# Altium PCB PCB1_ZONES_1.PcbDoc (part 1 of 2)
Units mil, origin at the board's own origin, x right, y up, seen from the top; angles counter-clockwise.
Board outline 1968.5 x 1968.5 mil, 2 copper layers (Top Layer, Bottom Layer); 97 components, 59 nets, 306 pads, 369 vias.
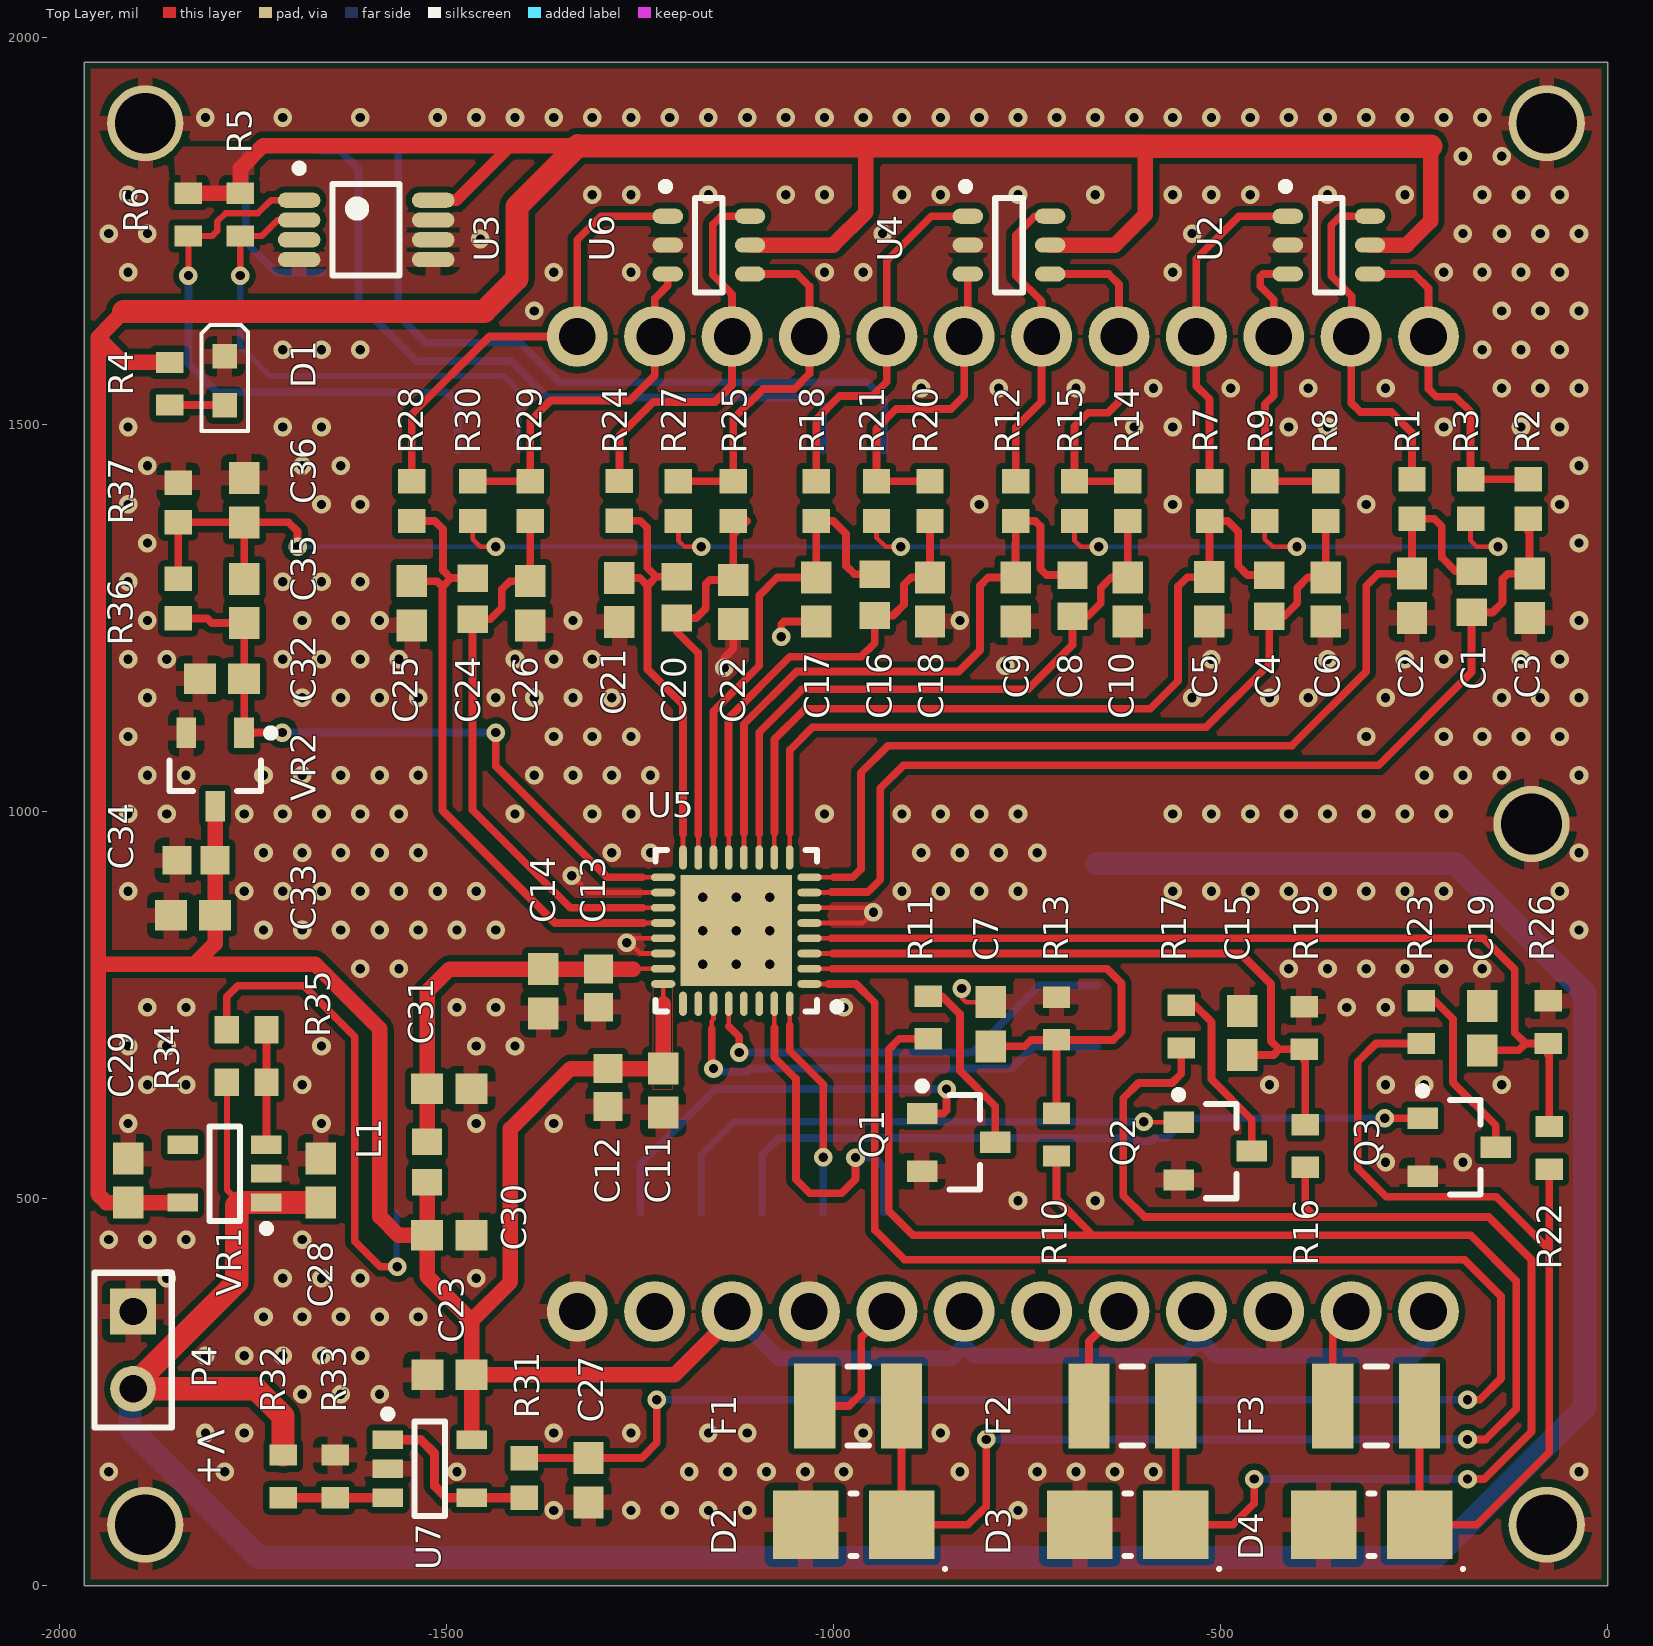
[diagram p0: Top Layer view]
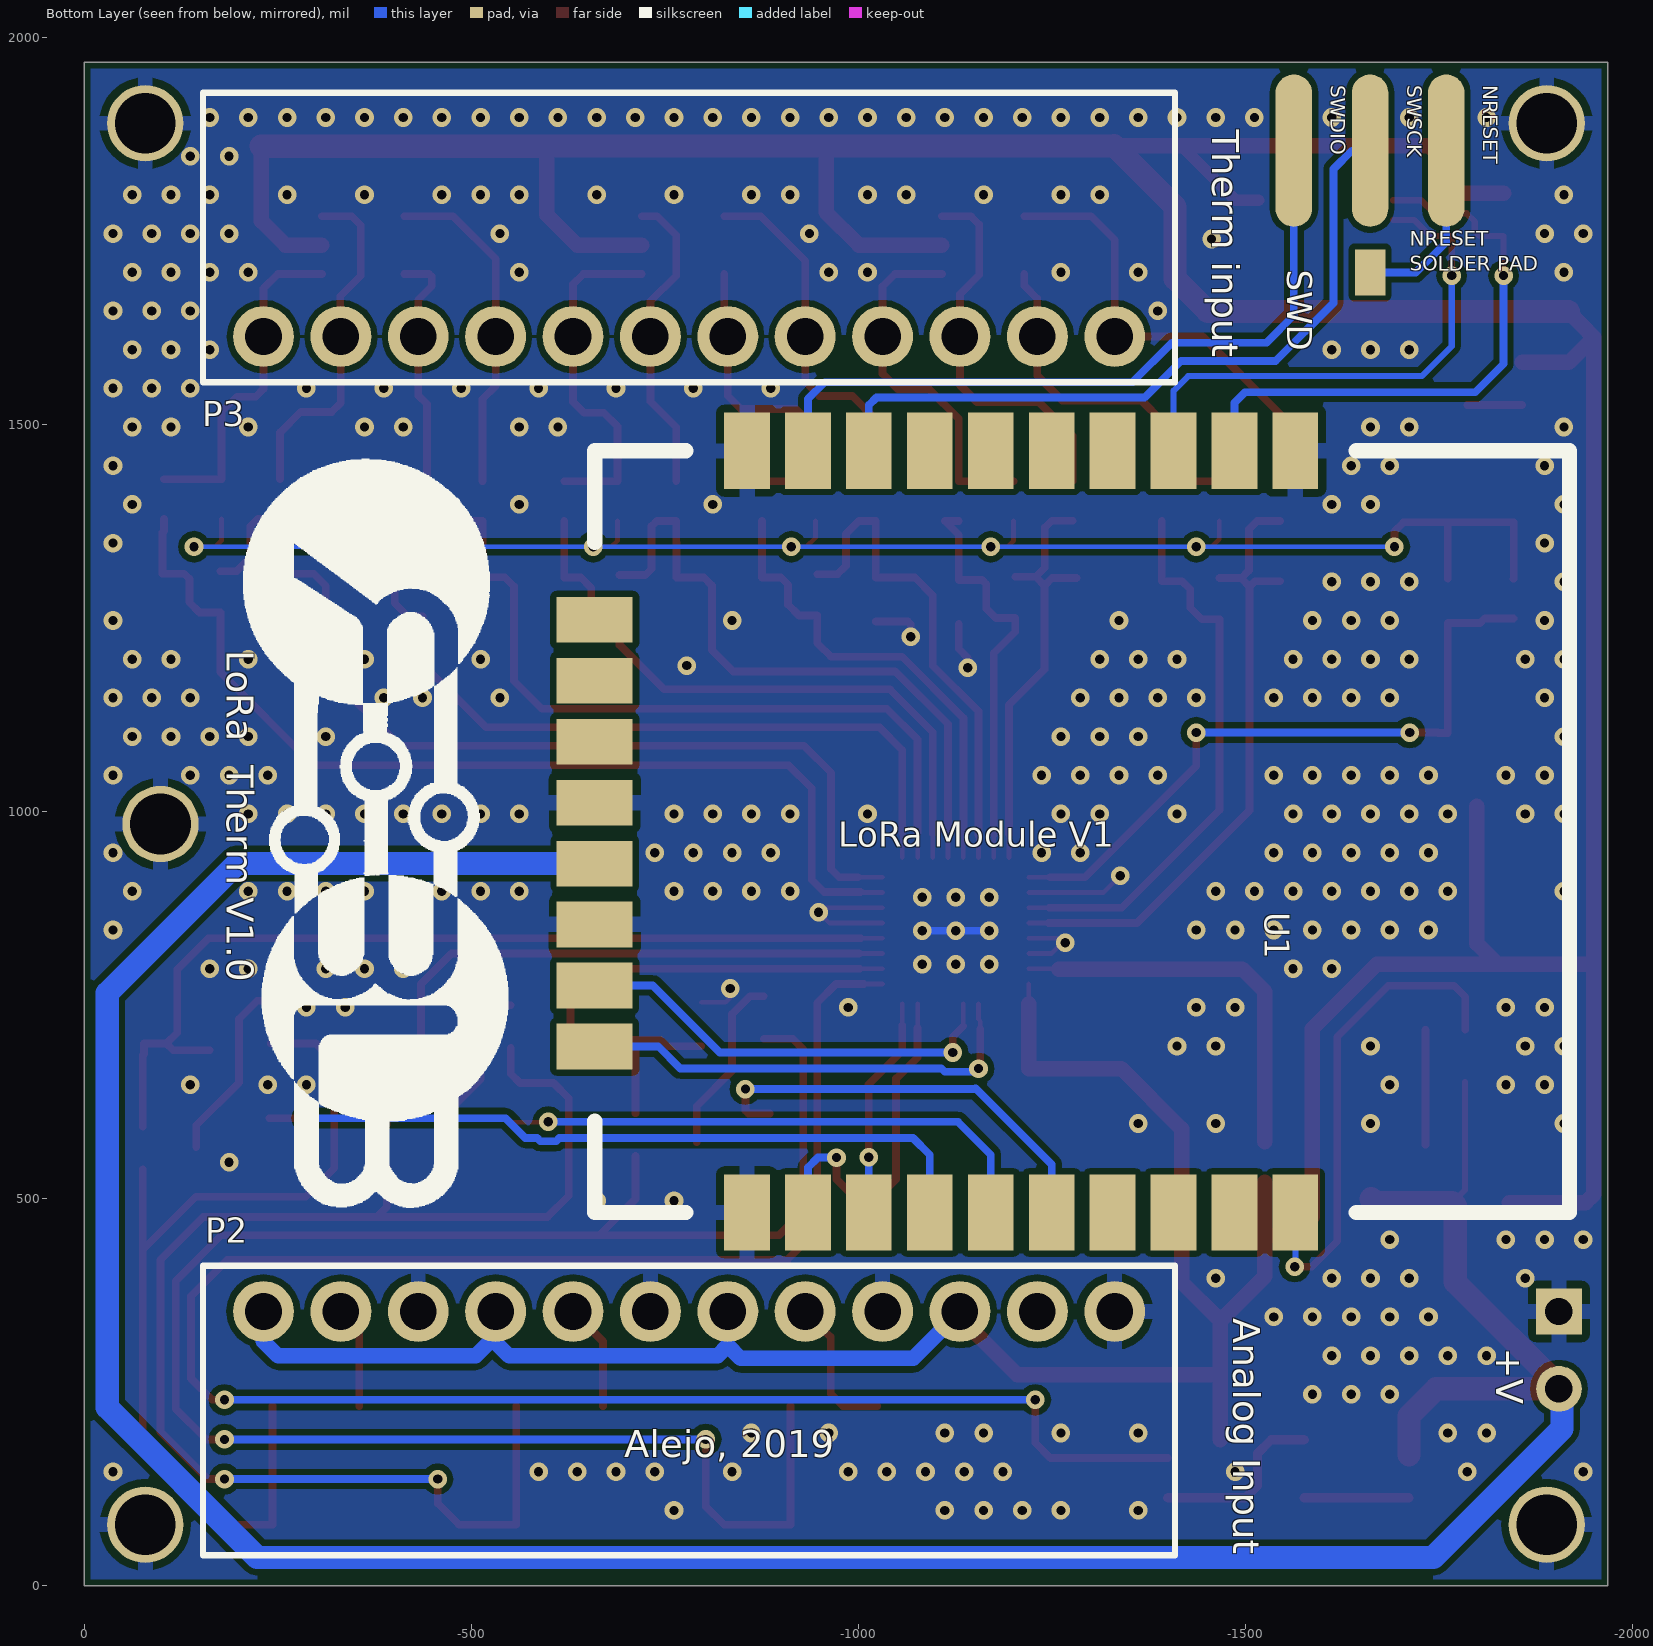
[diagram p1: Bottom Layer view, seen from below]
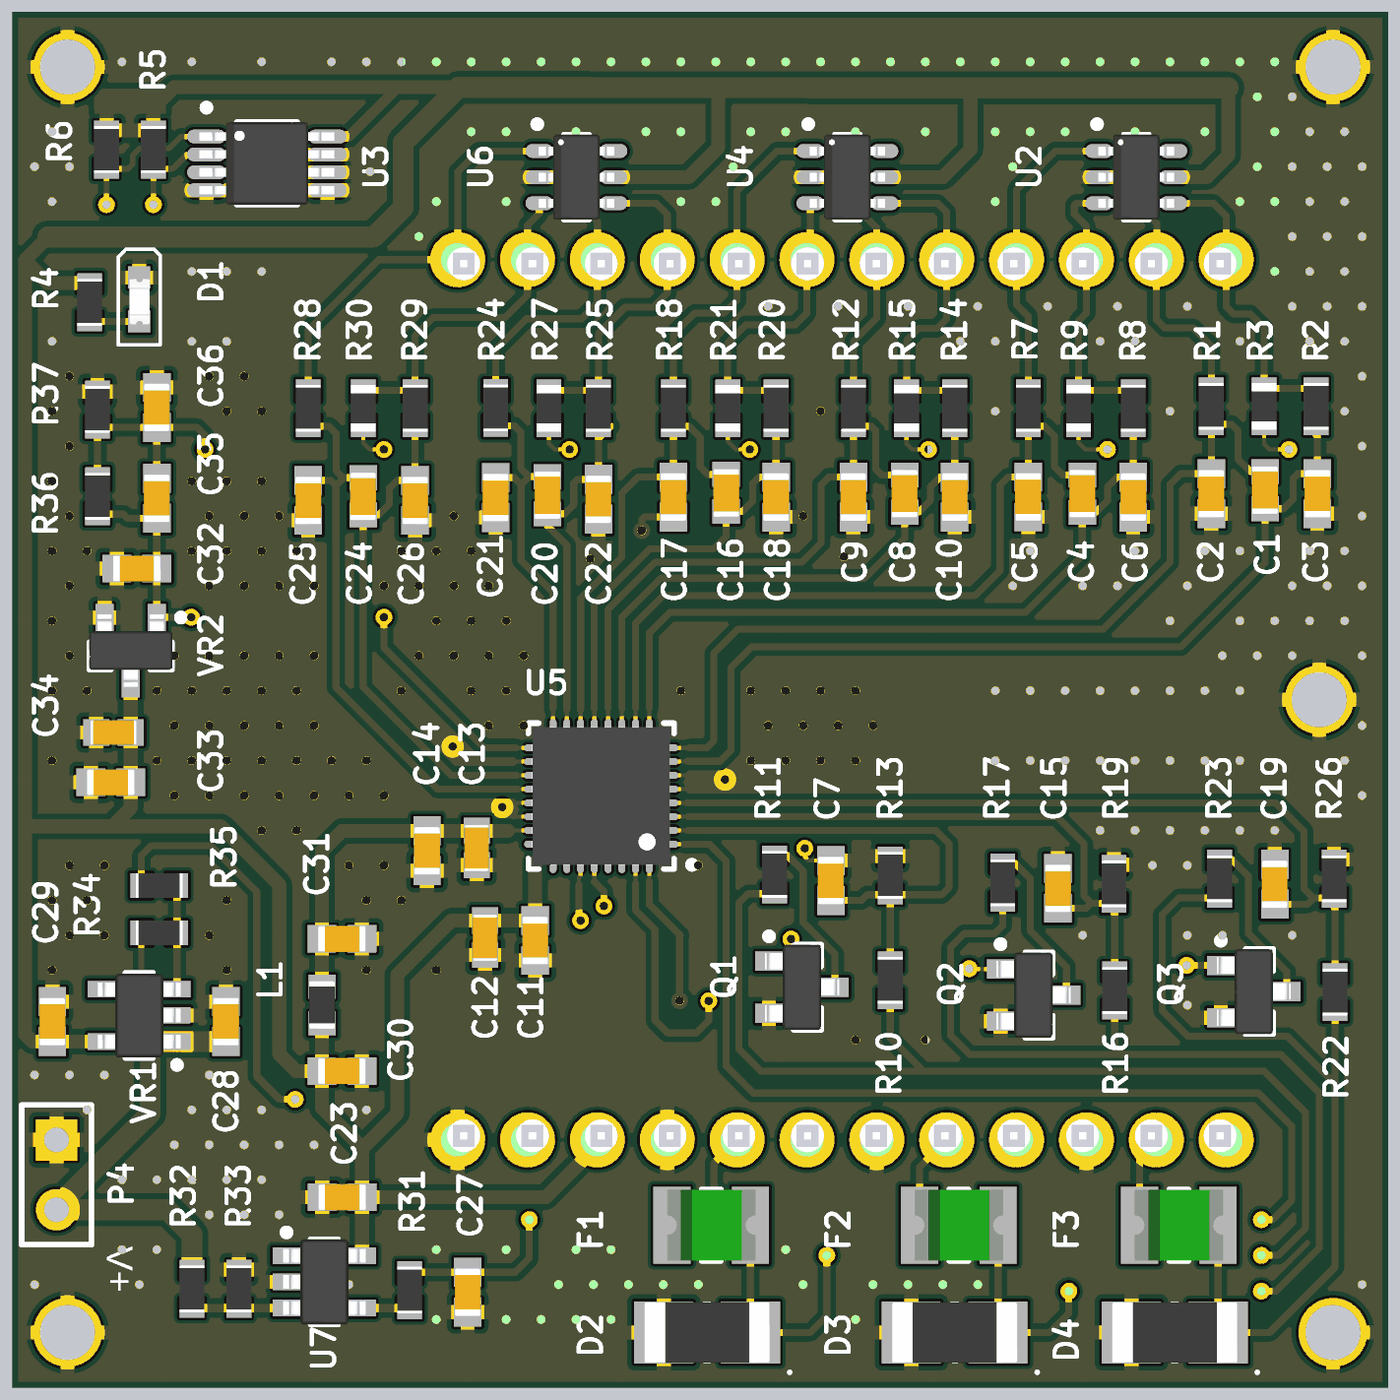
[diagram p2: 3D render of the assembled board from above, using the file's embedded part models]
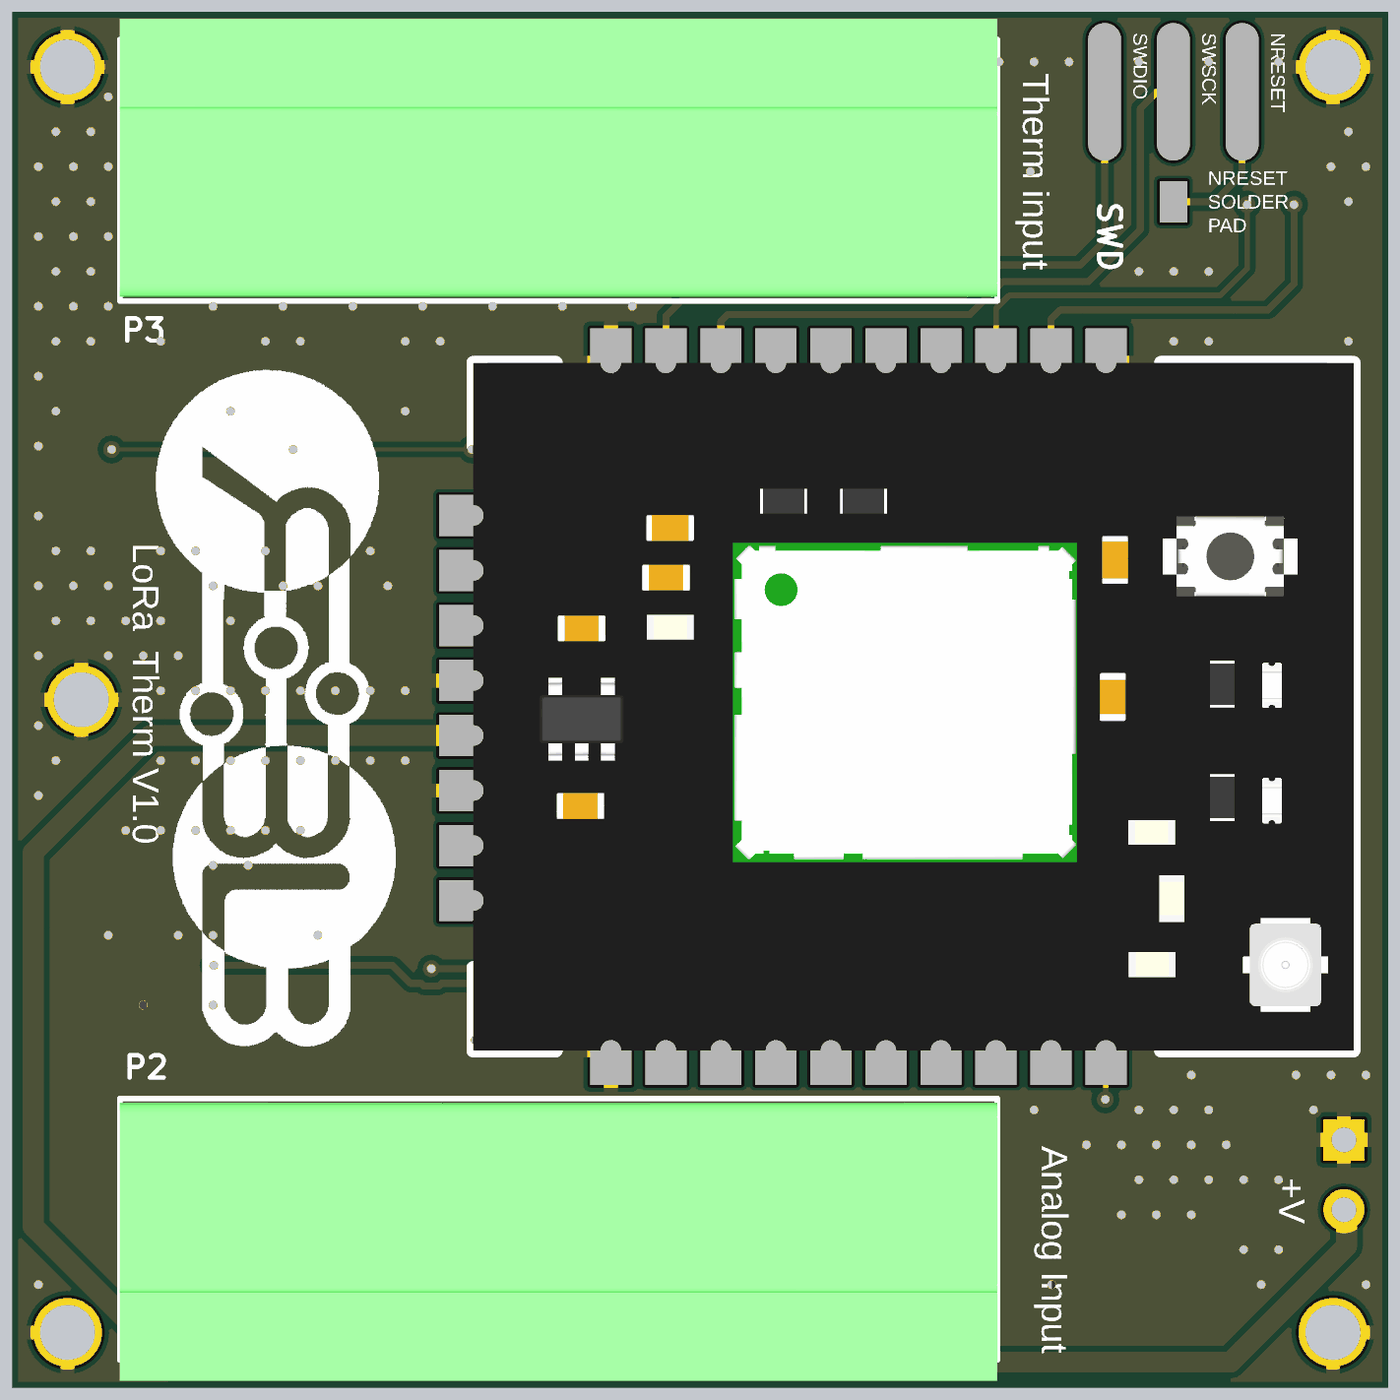
[diagram p3: 3D render of the assembled board from below, using the file's embedded part models]

## Layer stack, top to bottom
Top Solder: solder mask 0.4, Solder Resist, Dk 3.5
Top Layer: signal copper 1.4
Dielectric 1: dielectric 12.6, FR-4, Dk 4.8
Bottom Layer: signal copper 1.4
Bottom Solder: solder mask 0.4, Solder Resist, Dk 3.5

## Board outline
-1968.5,0 0,0 0,1968.5 -1968.5,1968.5

## Design rules (kind name [scope] priority, off if disabled: settings)
BoardOutlineClearance [All] p1: gap=7.87 ignorepadtopadclearanceinfootprint=FALSE except(15.75: Arc-SplitBarrior Arc-SplitContinuation Track-SplitBarrior Track-SplitContinuation SMDPad-SplitBarrior SMDPad-SplitContinuation THPad-SplitBarrior THPad-SplitContinuation Via-SplitBarrior Via-SplitContinuation Fill-SplitBarrior Fill-SplitContinuation Poly-SplitBarrior Poly-SplitContinuation Region-SplitBarrior Region-SplitContinuation Text-SplitBarrior Text-SplitContinuation)
Clearance "Clearance Bottom Layer" [OnLayer('Bottom Layer')] p1: gap=8 ignorepadtopadclearanceinfootprint=TRUE except(10: Arc-Text Track-Text SMDPad-Text THPad-Text Via-Text Fill-Text Poly-Text Region-Text Text-Text)
Clearance "Clearance Top Layer" [OnLayer('Top Layer')] p2: gap=8 ignorepadtopadclearanceinfootprint=TRUE except(10: Arc-Text Track-Text SMDPad-Text THPad-Text Via-Text Fill-Text Poly-Text Region-Text Text-Text)
Clearance [All] p3: gap=7.87 ignorepadtopadclearanceinfootprint=FALSE except(3.5: Arc-Arc Arc-Track Arc-SMDPad Track-Track Track-SMDPad SMDPad-SMDPad; 5: Arc-Via Track-Via SMDPad-Via THPad-Via Via-Via; 10: Arc-Text Track-Text SMDPad-Text THPad-Text Via-Text Fill-Text Poly-Text Region-Text Text-Text)
HoleSize [All] p1: absolutevalues=TRUE maxlimit=248.03 minlimit=7.87 maxpercent=80.000 minpercent=20.000
MinimumAnnularRing [All] p1: minimumring=3
MinimumSolderMaskSliver [All] p1: minsoldermaskwidth=3.94
PolygonConnect PolygonConnect_1 [All] p1: thpad.connectstyle=Relief thpad.reliefconductorwidth=20 thpad.reliefentries=4 thpad.polygonreliefangle="90 Angle" thpad.airgapwidth=10 smdpad.connectstyle=Relief smdpad.reliefconductorwidth=20 smdpad.reliefentries=4 smdpad.polygonreliefangle="90 Angle" smdpad.airgapwidth=10 via.connectstyle=Direct via.reliefconductorwidth=20 via.reliefentries=4 via.polygonreliefangle="90 Angle" via.airgapwidth=10
RoutingCorners [All] p1: cornerstyle=Round minsetback=100 maxsetback=100
RoutingVias [All] p1: holewidth=19.68 width=39.37 viastyle="Through Hole" minholewidth=7.87 minwidth=17.72 maxholewidth=39.37 maxwidth=78.74
SMDEntry [All] p1: side=TRUE corner=FALSE anyangle=FALSE
SilkToSilkClearance [All] p1: silktosilkclearance=3.94
SilkToSolderMaskClearance [IsPad] p1: minsilkscreentomaskgap=3.94 clearancetoexposedcopper=TRUE
SolderMaskExpansion [All] p1: expansion=4
Width [All] p1: maxlimit=100 minlimit=3.5 preferedwidth=15
25 further rules are at their usual default settings.

## Classes and differential pairs
component class Sheet1: C1 C2 C3 C4 C5 C6 C7 C8 C9 C10 C11 C12 C13 C14 C15 C16 C17 C18 C19 C20 C21 C22 C23 C24 C25 C26 C27 D1 D2 D3 D4 F1 F2 F3 P2 P3 Q1 Q2 Q3 R1 R2 R3 R4 R5 R6 R7 R8 R9 R10 R11 R12 R13 R14 R15 R16 R17 R18 R19 R20 R21 R22 R23 R24 R25 R26 R27 R28 R29 R30 R31 R32 R33 SWD U1 U2 U3 U4 U5 U6 U7
component class supply: C28 C29 C30 C31 C32 C33 C34 C35 C36 L1 P4 R34 R35 R36 R37 VR1 VR2

## Components (designator, comment, footprint, x,y, rotation, side; value= is the part's Value field where it differs from the comment)
C1 "0.1uF" Chip2PinKEMETcap -175.9,1284.2 r270 top
C2 "0.01 uF" Chip2PinWURTcap -252.86,1279.2 r270 top
C3 "0.01 uF" Chip2PinWURTcap -100.9,1279.2 r90 top
C4 "0.1uF" Chip2PinKEMETcap -437.47,1279.36 r270 top
C5 "0.01 uF" Chip2PinWURTcap -514.76,1274.61 r270 top
C6 "0.01 uF" Chip2PinWURTcap -364.44,1274.36 r90 top
C7 "0.01uF 0603" Chip2PinWURTcap -797.27,725.56 r90 top
C8 "0.1uF" Chip2PinKEMETcap -691.58,1279.36 r270 top
C9 "0.01 uF" Chip2PinWURTcap -765.07,1274.36 r270 top
C10 "0.01 uF" Chip2PinWURTcap -620.07,1274.36 r90 top
C11 "4.7uF" CHIP2TAIYOCAP -1292.04,643.64 r90 top
C12 "0.01 uF" Chip2PinWURTcap -1220.47,639.7 r270 top
C13 "4.7uF" CHIP2TAIYOCAP -1304.24,772.06 r90 top
C14 "0.01 uF" Chip2PinWURTcap -1375.28,768.12 r270 top
C15 "0.01uF 0603" Chip2PinWURTcap -472.27,714.36 r90 top
C16 "0.1uF" Chip2PinKEMETcap -947.21,1280.27 r270 top
C17 "0.01 uF" Chip2PinWURTcap -1022.67,1274.36 r270 top
C18 "0.01 uF" Chip2PinWURTcap -875.7,1274.36 r90 top
C19 "0.01uF 0603" Chip2PinWURTcap -161.96,720.28 r90 top
C20 "0.1uF" Chip2PinKEMETcap -1202.82,1277.04 r270 top
C21 "0.01 uF" Chip2PinWURTcap -1277.01,1273.7 r270 top
C22 "0.01 uF" Chip2PinWURTcap -1129.99,1271.13 r90 top
C23 "1uF" Chip2PinWURTcap -1496.69,272.29 r0 top
C24 "0.1uF" Chip2PinKEMETcap -1466.81,1275.42 r270 top
C25 "0.01 uF" Chip2PinWURTcap -1545.28,1269.52 r270 top
C26 "0.01 uF" Chip2PinWURTcap -1392.27,1269.52 r90 top
C27 "NM" Chip2PinWURTcap -1317.01,136.3 r270 top
C28 "1uF" Chip2PinWURTcap -1663.1,523.62 r90 top
C29 "1uF" Chip2PinWURTcap -1911.47,523.62 r90 top
C30 "0.01 uF" Chip2PinWURTcap -1497.05,452.76 r0 top
C31 "0.01 uF" Chip2PinWURTcap -1497.05,642.07 r0 top
C32 "1uF" Chip2PinWURTcap -1790.55,1171.98 r0 top
C33 "0.01 uF" Chip2PinWURTcap -1827.95,866.14 r0 top
C34 "4.7uF" CHIP2TAIYOCAP -1824.02,937.39 r0 top
C35 "1uF" Chip2PinWURTcap -1762.01,1272.54 r270 top
C36 "1uF" Chip2PinWURTcap -1762.01,1402.63 r270 top
D1 "Red LEDs" Wurth_LED_0603 -1787.21,1557.09 r90 top
D2 "10v" CHIP2PIN-SMB10JA -974.41,78.74 r0 top
D3 "10v" CHIP2PIN-SMB10JA -620.08,78.74 r0 top
D4 "10v" CHIP2PIN-SMB10JA -305.12,78.74 r0 top
F1 "MICROSMD005F" CHIP2PINMICROSMD005F -968.5,232.28 r0 top
F2 "MICROSMD005F" CHIP2PINMICROSMD005F -614.17,232.28 r0 top
F3 "MICROSMD005F" CHIP2PINMICROSMD005F -299.21,232.28 r0 top
L1 "120 ohm, 100MHz" CHIP22506031217Z0-FEBREAD -1525.59,547.41 r90 top
P2 "HEADER" 1881545 -781.5,354.33 r0 bottom locked
P3 "HEADER" 1881545 -781.5,1614.17 r180 bottom locked
P4 "" HDR1X2 -1905.51,354.33 r270 top
Q1 "FDV305N" SOT23-3PIN-ON-STANT -838.58,572.83 r0 top
Q2 "FDV305N" SOT23-3PIN-ON-STANT -507.27,561.63 r0 top
Q3 "FDV305N" SOT23-3PIN-ON-STANT -191.96,566.63 r0 top
R1 "1K" CHIP2VISHAYRES_0603 -252.86,1404.2 r90 top
R2 "1K" CHIP2VISHAYRES_0603 -102.86,1404.2 r90 top
R3 "10K" CHIP2PIN-ROHM-RES -177.17,1404.2 r270 top
R4 "470 Ohms" ChipYAGEO_0603 -1858.27,1553.15 r270 top
R5 "10K 0603 1%" ChipYAGEO_0603 -1766.9,1771.65 r90 top
R6 "10K 0603 1%" ChipYAGEO_0603 -1834,1771.65 r90 top
R7 "1K" CHIP2VISHAYRES_0603 -514.44,1401.42 r90 top
R8 "1K" CHIP2VISHAYRES_0603 -364.44,1401.42 r90 top
R9 "10K" CHIP2PIN-ROHM-RES -442.91,1401.42 r270 top
R10 "7.5K" ChipYAGEO_0603 -712.27,582.83 r270 top
R11 "523ohm 0603 1%" ChipYAGEO_0603 -877.95,734.25 r270 top
R12 "1K" CHIP2VISHAYRES_0603 -765.01,1401.42 r90 top
R13 "2.49K" ChipYAGEO_0603 -712.27,732.83 r270 top
R14 "1K" CHIP2VISHAYRES_0603 -620.07,1401.42 r90 top
R15 "10K" CHIP2PIN-ROHM-RES -688.98,1401.42 r270 top
R16 "7.5K" ChipYAGEO_0603 -390.96,568.15 r270 top
R17 "523ohm 0603 1%" ChipYAGEO_0603 -551.18,722.44 r270 top
R18 "1K" CHIP2VISHAYRES_0603 -1022.67,1401.42 r90 top
R19 "2.49K" ChipYAGEO_0603 -392.27,720.71 r270 top
R20 "1K" CHIP2VISHAYRES_0603 -875.7,1401.42 r90 top
R21 "10K" CHIP2PIN-ROHM-RES -944.88,1401.42 r270 top
R22 "7.5K" ChipYAGEO_0603 -75.65,565.71 r270 top
R23 "523ohm 0603 1%" ChipYAGEO_0603 -241.02,728.15 r270 top
R24 "1K" CHIP2VISHAYRES_0603 -1277.01,1401.83 r90 top
R25 "1K" CHIP2VISHAYRES_0603 -1129.99,1401.42 r90 top
R26 "2.49K" ChipYAGEO_0603 -76.96,728.15 r270 top
R27 "10K" CHIP2PIN-ROHM-RES -1200.79,1401.42 r270 top
R28 "1K" CHIP2VISHAYRES_0603 -1545.28,1401.42 r90 top
R29 "1K" CHIP2VISHAYRES_0603 -1392.27,1401.42 r90 top
R30 "10K" CHIP2PIN-ROHM-RES -1466.54,1401.42 r270 top
R31 "0 ohm" CHIP2VISHAYRES_0603 -1400.07,139.25 r90 top
R32 "1M" ChipYAGEO_0603 -1711.59,141.22 r270 top
R33 "1M" ChipYAGEO_0603 -1644.5,141.22 r270 top
R34 "0 ohm" CHIP2VISHAYRES_0603 -1758.74,650.48 r180 top
R35 "0 ohm" CHIP2VISHAYRES_0603 -1758.74,718.5 r0 top
R36 "1K" CHIP2VISHAYRES_0603 -1847.01,1275.49 r90 top
R37 "1K" CHIP2VISHAYRES_0603 -1847.01,1399.68 r90 top
SWD "SWD" EDGECONN-5P -1562.99,1854.33 r180 bottom (schematic designator P?)
U1 "loRa node v1" LORA_NODE -659.45,482.28 r270 bottom locked
U2 "IP4220CZ6F" TSOP6-IP4220CZ6F -360.24,1732.28 r0 top
U3 "MCP9808T" SOP127P600-8N-MCP9808T -1604.33,1751.97 r0 top
U4 "IP4220CZ6F" TSOP6-IP4220CZ6F -773.62,1732.28 r0 top
U5 "AD71994" QFN127P600-AD7194BCPZ -1125.98,846.46 r180 top
U6 "IP4220CZ6F" TSOP6-IP4220CZ6F -1161.42,1732.28 r0 top
U7 "MCP6001T-I/OT" SOT23-MCP600 -1522.28,151.06 r0 top
VR1 "TLV755P" SOT23-TLV755P -1787.28,532.48 r180 top
VR2 "AD1582BRTZ" SOT23-AD1582BRTZ -1799.41,1054.69 r270 top

## Footprints (in the part's own frame and the unit in brackets; to place one, negate y for a bottom-side part, rotate by r counter-clockwise, add the part's x,y. Pads: shape width x height; smd on the part's side, far side on the other; paste and mask are expansions set on the pad)
1881545 [mm]
  round 2 hole 1.2: 1(-13.97,0) 2(-11.43,0) 3(-8.89,0) 4(-6.35,0) 5(-3.81,0) 6(-1.27,0) 7(1.27,0) 8(3.81,0) 9(6.35,0) 10(8.89,0) 11(11.43,0) 12(13.97,0)
  silkscreen extent -15.95,-1.5 15.95,8, body extent -15.95,-1.35 15.95,8.75, height 8.1
CHIP2PIN-ROHM-RES [mm]
  rect 0.8x0.9 smd: 1(-0.65,0) 2(0.65,0)
  body extent -0.85,-0.45 0.85,0.45, height 0.55
CHIP2PIN-SMB10JA [mm]
  rect 2.15x2.25 smd: 1(-1.575,0) 2(1.575,0)
  silkscreen extent -0.1,-1.5 3.05,1.02, body extent -2.28,-1.1 2.28,1.1, height 2.5
Chip2PinKEMETcap [mm]
  rect 0.9x1 smd: 1(-0.675,0) 2(0.675,0)
  body extent -0.87,-0.48 0.87,0.48, height 0.55
CHIP2PINMICROSMD005F [mm]
  rect 1.35x2.8 smd: 1(-1.425,0) 2(1.425,0)
  silkscreen extent -0.35,-1.3 0.35,1.3, body extent -1.61,-1.29 1.61,1.29, height 0.67
Chip2PinWURTcap [mm]
  rect 1.05x1 smd: 1(-0.725,0) 2(0.725,0)
  body extent -0.87,-0.48 0.87,0.48, height 0.55
CHIP2TAIYOCAP [mm]
  rect 0.95x0.95 smd: 1(-0.625,0) 2(0.625,0)
  body extent -0.85,-0.45 0.85,0.45, height 0.55
CHIP2VISHAYRES_0603 [mm]
  rect 0.8x0.9 smd: 1(-0.65,0) 2(0.65,0)
  body extent -0.85,-0.45 0.85,0.45, height 0.6
CHIP22506031217Z0-FEBREAD [mm]
  rect 0.87x0.98 smd: 1(-0.665,0) 2(0.665,0)
  body extent -0.87,-0.48 0.87,0.48, height 0.95
ChipYAGEO_0603 [mm]
  rect 0.7x0.9 smd: 1(-0.7,0) 2(0.7,0)
  body extent -0.85,-0.45 0.85,0.45, height 0.55
EDGECONN-5P [mm]
  oval 1.2x5 smd: 1(2.5,0) 2(0,0) ""(5,0)
  rect 1x1.5 smd: ""(2.5,-4)
  Top Layer lines w0.254: 5,0 5,-3 4,-4 2.5,-4
HDR1X2 [mm] "Connector; Header; 2 Position"
  rect 1.5x1.5 hole 0.9: 1(0,0)
  round 1.5 hole 0.9: 2(2.54,0)
  silkscreen extent -1.27,-1.27 3.81,1.27
LORA_NODE [mm]
  rect 2.5x1.5 smd: 1(-25,23) 2(-25,21) 3(-25,19) 4(-25,17) 5(-25,15) 6(-25,13) 7(-25,11) 8(-25,9) 9(-25,7) 10(-25,5) 19(0,5) 20(0,7) 21(0,9) 22(0,11) 23(0,13) 24(0,15) 25(0,17) 26(0,19) 27(0,21) 28(0,23)
  rect 1.5x2.5 smd: 11(-19.45,0) 12(-17.45,0) 13(-15.45,0) 14(-13.45,0) 15(-11.45,0) 16(-9.45,0) 17(-7.45,0) 18(-5.45,0)
  silkscreen extent -25,0 0,32, body extent -25,0 0,32, height 2.45
QFN127P600-AD7194BCPZ [mm]
  oval 0.8x0.25 smd: 1(-2.4,1.75) 2(-2.4,1.25) 3(-2.4,0.75) 4(-2.4,0.25) 5(-2.4,-0.25) 6(-2.4,-0.75) 7(-2.4,-1.25) 8(-2.4,-1.75) 17(2.4,-1.75) 18(2.4,-1.25) 19(2.4,-0.75) 20(2.4,-0.25) 21(2.4,0.25) 22(2.4,0.75) 23(2.4,1.25) 24(2.4,1.75)
  oval 0.25x0.8 smd: 9(-1.75,-2.4) 10(-1.25,-2.4) 11(-0.75,-2.4) 12(-0.25,-2.4) 13(0.25,-2.4) 14(0.75,-2.4) 15(1.25,-2.4) 16(1.75,-2.4) 25(1.75,2.4) 26(1.25,2.4) 27(0.75,2.4) 28(0.25,2.4) 29(-0.25,2.4) 30(-0.75,2.4) 31(-1.25,2.4) 32(-1.75,2.4)
  rect 3.65x3.65 smd: 33(0,0)
  silkscreen extent -3.43,-2.65 2.65,2.65, body extent -2.52,-2.52 2.52,2.52, height 0.8
SOP127P600-8N-MCP9808T [mm]
  oval 1.4x0.5 smd: 1(-2.2,0.975) 2(-2.2,0.325) 3(-2.2,-0.325) 4(-2.2,-0.975) 5(2.2,-0.975) 6(2.2,-0.325) 7(2.2,0.325) 8(2.2,0.975)
  silkscreen extent -2.32,-1.5 1.1,2.15, body extent -2.45,-1.5 2.45,1.5, height 1.1
SOT23-3PIN-ON-STANT [mm]
  rect 1x0.7 smd: 1(-1.2,0.95) 2(-1.2,-0.95) 3(1.2,0)
  silkscreen extent -1.32,-1.55 0.7,1.97, body extent -1.35,-1.55 1.35,1.55, height 1.2
SOT23-AD1582BRTZ [mm]
  rect 1x0.65 smd: 1(-1.2,0.95) 2(-1.2,-0.95) 3(1.2,0)
  silkscreen extent -1.32,-1.5 0.7,1.95, body extent -1.32,-1.52 1.32,1.52, height 1.12
SOT23-MCP600 [mm]
  rect 1x0.6 smd: 1(-1.375,0.95) 2(-1.375,0) 3(-1.375,-0.95) 4(1.375,-0.95) 5(1.375,0.95)
  silkscreen extent -1.5,-1.55 0.5,1.92, body extent -1.5,-1.55 1.5,1.55, height 1.45
SOT23-TLV755P [mm]
  rect 1x0.6 smd: 1(-1.375,0.95) 2(-1.375,0) 3(-1.375,-0.95) 4(1.375,-0.95) 5(1.375,0.95)
  silkscreen extent -1.5,-1.55 0.5,1.92, body extent -1.5,-1.53 1.5,1.53, height 1.45
TSOP6-IP4220CZ6F [mm] "TSOP, 6-Leads, Body 2.90x1.50mm, Pitch 0.95mm, IPC Medium Density"
  oval 1x0.5 smd: 1(-1.35,0.95) 2(-1.35,0) 3(-1.35,-0.95) 4(1.35,-0.95) 5(1.35,0) 6(1.35,0.95)
  silkscreen extent -1.55,-1.55 0.45,2.05, body extent -1.38,-1.55 1.38,1.55, height 1.1
Wurth_LED_0603 [mm]
  rect 0.8x0.8 smd: 1(-0.8,0) 2(0.8,0)
  silkscreen extent -1.65,-0.76 1.83,0.76, body extent -0.9,-0.38 0.75,0.35, height 0.68

## Part data
C1 C4 C8 C16 C20 C24: library part C0603C104J3RAC, "Multilayer Ceramic Capacitors MLCC - SMD/SMT 25V 0.1uF 0603 X7R 0.05", Capacitance="0.1 uF", Capacitance - nF="100 nF", Capacitance - pF="100000 pF", Case Code - in=0603, Case Code - mm=1608, Dielectric=X7R, Manufacturer=KEMET, Maximum Operating Temperature="+ 125 C", Minimum Operating Temperature="- 55 C", Package / Case="0603 (1608 metric)", Supplier Part Number 1=80-C0603C104J3RAC, Tolerance="5 %", Voltage Rating AC=-, Voltage Rating DC="25 VDC", Brand=KEMET, Category="Multilayer Ceramic Capacitors MLCC - SMD/SMT", Class="Class 2", CNHTS=8532241000, ComponentLink1Description=http://www.mouser.com/datasheet/2/212/KEM_C1002_X7R_SMD-1102033.pdf, ComponentLink1URL=http://www.mouser.com/datasheet/2/212/KEM_C1002_X7R_SMD-1102033.pdf, Height="0.8 mm", HTS Code=8532240020, LatestRevisionDate=17-Jul-2002, LatestRevisionNote="Re-released for DXP Platform.", Length="1.6 mm", Manufacturer Part Number=C0603C104J3RAC, Minimum Order Quantity=1, PackageDescription="Radial Cap, Thru-Hole; 2 Leads; 0.3 in Pin Spacing", PackageReference=RAD-0.3, Packaging="Cut Tape", Pricing 1="1=0.367, 10=0.213, 100=0.129, 500=0.117, 1000=0.106, 4000=0.079, 8000=0.072, 24000=0.069, 48000=0.061 (EUR)", Product="General Type MLCCs", Product Type="Ceramic Capacitors", Published=8-Jun-2000, Publisher="Altium Limited", Reeling=True, RoHS="RoHS Compliant", RoHS - Mouser=Y, Series="SMD Comm X7R", Standard Pack Qty=4000, Stock 1=3422, Subcategory=Capacitors, Supplier 1=Mouser, TARIC=8532240000, Termination=Standard, Termination Style=SMD/SMT, Width="0.8 mm"
C2 C3 C5 C6 C9 C10 C12 C14 C17 C18 C21 C22 C25 C26 C30 C31 C33: library part 885012206089, "Multilayer Ceramic Capacitors MLCC - SMD/SMT WCAP-CSGP 0.01uF 0603 10% 50V MLCC", Capacitance - nF="10 nF", Capacitance - pF="10000 pF", Case Code - in=0603, Case Code - mm=1608, Dielectric=X7R, Manufacturer="Wurth Electronics", Maximum Operating Temperature="+ 125 C", Minimum Operating Temperature="- 55 C", Package / Case="0603 (1608 metric)", Supplier Part Number 1=710-885012206089, Tolerance="10 %", Voltage Rating DC="50 VDC", Brand="Wurth Electronics", Capacitance="0.01 uF", Category="Multilayer Ceramic Capacitors MLCC - SMD/SMT", ComponentLink1Description=https://www.mouser.com/datasheet/2/445/885012206089-554597.pdf, ComponentLink1URL=https://www.mouser.com/datasheet/2/445/885012206089-554597.pdf, Height="0.8 mm", Length="1.6 mm", Manufacturer Part Number=885012206089, Minimum Order Quantity=1, Packaging="Cut Tape", Pricing 1="1=0.040, 10=0.032, 50=0.026, 100=0.021, 250=0.018, 500=0.017, 4000=0.017 (EUR)", Product="General Type MLCCs", Product Type="Ceramic Capacitors", Reeling=True, RoHS="RoHS Compliant", RoHS - Mouser=Y, Series=WCAP-CSGP, Standard Pack Qty=4000, Stock 1=174725, Subcategory=Capacitors, Supplier 1=Mouser, Termination Style=SMD/SMT, Width="0.8 mm"
C7 C15 C19: library part 885012206089, "Multilayer Ceramic Capacitors MLCC - SMD/SMT WCAP-CSGP 0.01uF 0603 10% 50V MLCC", Capacitance="0.01 uF", Capacitance - nF="10 nF", Capacitance - pF="10000 pF", Case Code - in=0603, Case Code - mm=1608, Dielectric=X7R, Manufacturer="Wurth Electronics", Maximum Operating Temperature="+ 125 C", Minimum Operating Temperature="- 55 C", Package / Case="0603 (1608 metric)", Supplier Part Number 1=710-885012206089, Tolerance="10 %", Voltage Rating DC="50 VDC", Brand="Wurth Electronics", Category="Multilayer Ceramic Capacitors MLCC - SMD/SMT", ComponentLink1Description=https://www.mouser.com/datasheet/2/445/885012206089-554597.pdf, ComponentLink1URL=https://www.mouser.com/datasheet/2/445/885012206089-554597.pdf, Height="0.8 mm", Length="1.6 mm", Manufacturer Part Number=885012206089, Minimum Order Quantity=1, Packaging="Cut Tape", Pricing 1="1=0.040, 10=0.032, 50=0.026, 100=0.021, 250=0.018, 500=0.017, 4000=0.017 (EUR)", Product="General Type MLCCs", Product Type="Ceramic Capacitors", Reeling=True, RoHS="RoHS Compliant", RoHS - Mouser=Y, Series=WCAP-CSGP, Standard Pack Qty=4000, Stock 1=174725, Subcategory=Capacitors, Supplier 1=Mouser, Termination Style=SMD/SMT, Width="0.8 mm"
C11 C13 C34: library part JMK107BJ475KA-T, "Multilayer Ceramic Capacitors MLCC - SMD/SMT 4.7uF 6.3V X5R 0603+/-10% Gen Purp", Capacitance="4.7 uF", Capacitance - nF="4700 nF", Case Code - in=0603, Case Code - mm=1608, Dielectric=X5R, Manufacturer="Taiyo Yuden", Maximum Operating Temperature="+ 85 C", Minimum Operating Temperature="- 55 C", Package / Case="0603 (1608 metric)", Supplier Part Number 1=963-JMK107BJ475KA-T, Tolerance="10 %", Voltage Rating DC="6.3 VDC", Brand="Taiyo Yuden", Category="Multilayer Ceramic Capacitors MLCC - SMD/SMT", Class="Class 2", ComponentLink1Description=https://www.mouser.com/datasheet/2/396/mlcc02_e-1307760.pdf, ComponentLink1URL=https://www.mouser.com/datasheet/2/396/mlcc02_e-1307760.pdf, Height="0.8 mm", Length="1.6 mm", Manufacturer Part Number=JMK107BJ475KA-T, Minimum Order Quantity=1, Packaging="Cut Tape", Pricing 1="1=0.114, 10=0.042, 100=0.029, 500=0.024, 1000=0.019, 4000=0.019, 8000=0.014, 12000=0.012 (EUR)", Product="General Type MLCCs", Product Type="Ceramic Capacitors", Reeling=True, RoHS="RoHS Compliant", RoHS - Mouser=Y, Series=M, Standard Pack Qty=4000, Stock 1=0, Subcategory=Capacitors, Supplier 1=Mouser, Termination=Standard, Termination Style=SMD/SMT, Type="General Purpose", Width="0.8 mm"
C23 C28 C29 C32 C35 C36: library part 885012206052, "Ceramic Capacitors", Capacitance="1 uF", Capacitance - nF="1000 nF", Case Code - in=0603, Case Code - mm=1608, Dielectric=X7R, Manufacturer="Wurth Electronics", Maximum Operating Temperature="+ 125 C", Minimum Operating Temperature="- 55 C", Package / Case="0603 (1608 metric)", Supplier Part Number 1=710-885012206052, Tolerance="10 %", Voltage Rating DC="16 VDC", Brand="Wurth Electronics", Category="Multilayer Ceramic Capacitors MLCC - SMD/SMT", CNHTS=8532241000, ComponentLink1Description=http://www.mouser.com/datasheet/2/445/885012206052-554330.pdf, ComponentLink1URL=http://www.mouser.com/datasheet/2/445/885012206052-554330.pdf, Height="0.8 mm", HTS Code=8532240020, LatestRevisionDate=17-Jul-2002, LatestRevisionNote="Re-released for DXP Platform.", Length="1.6 mm", Manufacturer Part Number=885012206052, Minimum Order Quantity=1, PackageDescription="Radial Cap, Thru-Hole; 2 Leads; 0.3 in Pin Spacing", PackageReference=RAD-0.3, Packaging="Cut Tape", Pricing 1="1=0.110, 10=0.104, 50=0.085, 100=0.067, 250=0.059, 500=0.054, 4000=0.054 (EUR)", Product="General Type MLCCs", Product Type="Ceramic Capacitors", Published=8-Jun-2000, Publisher="Altium Limited", Reeling=True, RoHS="RoHS Compliant", RoHS - Mouser=Y, Series=WCAP-CSGP, Standard Pack Qty=4000, Stock 1=27157, Subcategory=Capacitors, Supplier 1=Mouser, TARIC=8532240000, Termination Style=SMD/SMT, Width="0.8 mm"
C27: library part 0603_CAP
D1: library part 150060RS75000, "Typical INFRARED GaAs LED", If - Forward Current="20 mA", Illumination Color=Red, Lens Color/Style="Water Clear", Manufacturer="Wurth Electronics", Maximum Operating Temperature="+ 85 C", Minimum Operating Temperature="- 40 C", Package / Case="0603 (1608 metric)", Power Rating="72 mW", Supplier Part Number 1=710-150060RS75000, Vf - Forward Voltage="2 V", Vr - Reverse Voltage="5 V", Wavelength/Color Temperature="625 nm", Brand="Wurth Electronics", Category="Standard LEDs - SMD", CNHTS=8541401000, ComponentLink1Description=http://www.mouser.com/datasheet/2/445/150060RS75000-368563.pdf, ComponentLink1URL=http://www.mouser.com/datasheet/2/445/150060RS75000-368563.pdf, Height="0.7 mm", HTS Code=8541402000, LatestRevisionDate=08-Jul-2005, LatestRevisionNote="Mech Layer 1 removed.", Length="1.6 mm", Lens Dimensions="1.1 mm x 0.8 mm", Lens Shape=Rectangular, Luminous Intensity="250 mcd", Manufacturer Part Number=150060RS75000, Minimum Order Quantity=1, Mounting Style=SMD/SMT, MXHTS=85414001, PackageDescription="LED; 2 Leads", PackageReference=LED-0, Packaging="Cut Tape", Peak Wavelength="630 nm", Pricing 1="1=0.130, 10=0.126, 50=0.115, 100=0.099, 500=0.085, 4000=0.085 (EUR)", Product="Red LEDs", Product Type="LED - Standard", Published=8-Jun-2000, Publisher="Altium Limited", Reeling=True, RoHS="RoHS Compliant", RoHS - Mouser=Y, Series=WL-SMCW, Standard Pack Qty=4000, Stock 1=74254, Subcategory=LEDs, Supplier 1=Mouser, TARIC=8541401000, Viewing Angle="140 deg", Width="0.8 mm"
D2 D3 D4: library part SMBJ10A-13-F, "ESD Suppressors / TVS Diodes 600W 10.0V", Breakdown Voltage="12.8 V", Clamping Voltage="17 V", Manufacturer="Diodes Incorporated", Maximum Operating Temperature="+ 150 C", Minimum Operating Temperature="- 55 C", Package / Case="DO-214AA-2 (SMB)", Pd - Power Dissipation="600 W", Supplier Part Number 1=621-SMBJ10A-13-F, Vesd - Voltage ESD Air Gap=-, Working Voltage="10 V", Brand="Diodes Incorporated", Category="ESD Suppressors / TVS Diodes", ComponentLink1Description=https://www.mouser.com/datasheet/2/115/ds19002-1078141.pdf, ComponentLink1URL=https://www.mouser.com/datasheet/2/115/ds19002-1078141.pdf, Manufacturer Part Number=SMBJ10A-13-F, Minimum Order Quantity=1, Packaging="Cut Tape", Polarity=Unidirectional, Pricing 1="1=0.358, 10=0.248, 100=0.114, 1000=0.087, 3000=0.075, 9000=0.068, 24000=0.064 (EUR)", Product Type="TVS Diodes", Reeling=True, RoHS="RoHS Compliant", RoHS - Mouser=Y, Series=SMBJ, Standard Pack Qty=3000, Stock 1=4423, Subcategory="TVS Diodes / ESD Suppression Diodes", Supplier 1=Mouser, Termination Style=SMD/SMT, Vesd - Voltage ESD Contact=-
F1 F2 F3: library part MICROSMD005F-2, "Resettable Fuses - PPTC .05A 30V 10A IMAX", Current Rating - Max="10 A", Hold Current="50 mA", Manufacturer=Littelfuse, Maximum Operating Temperature="+ 85 C", Maximum Voltage="30 V", Minimum Operating Temperature="- 40 C", Package / Case="1210 (3225 metric)", Pd - Power Dissipation="1 W", Resistance="50 Ohms", Supplier Part Number 1=650-MICROSMD005F-2, Trip Current="150 mA", Brand=Littelfuse, Category="Resettable Fuses - PPTC", ComponentLink1Description=https://www.mouser.com/datasheet/2/240/Littelfuse_PTC_MICROSMD_Catalog_Datasheet.pdf-1021745.pdf, ComponentLink1URL=https://www.mouser.com/datasheet/2/240/Littelfuse_PTC_MICROSMD_Catalog_Datasheet.pdf-1021745.pdf, Height="0.85 mm", Length="3.43 mm", Manufacturer Part Number=MICROSMD005F-2, Minimum Order Quantity=1, Mounting Style=SMD/SMT, Packaging="Cut Tape", Pricing 1="1=0.384, 10=0.301, 100=0.251, 250=0.227, 500=0.194, 1000=0.170, 4000=0.170 (EUR)", Product Type="Resettable Fuses - PPTC", Reeling=True, RoHS="RoHS Compliant", RoHS - Mouser=Y, Series=microSMD, Standard Pack Qty=4000, Stock 1=33972, Subcategory="PPTC Resettable Fuses", Supplier 1=Mouser, Termination Style=SMD/SMT, Tradename=PolySwitch, Type="PolySwitch Resettable Fuses", Width="2.8 mm"
L1: library part 2506031217Z0, "Ferrite Beads MULTILAYER CHIP BEAD Z=120 OHM@100MHz 25%", Capacitance=-, Manufacturer=Fair-Rite, Maximum DC Current="450 mA", Maximum DC Resistance="300 mOhms", Maximum Operating Temperature="+ 125 C", Minimum Operating Temperature="- 55 C", Operating Temperature Range="- 55 C to + 125 C", Package / Case="0603 (1608 metric)", Supplier Part Number 1=623-2506031217Z0, Test Frequency="100 MHz", Tolerance="25 %", Brand=Fair-Rite, Category="Ferrite Beads", ComponentLink1Description=https://www.mouser.com/datasheet/2/150/2506031217Z0-471794.pdf, ComponentLink1URL=https://www.mouser.com/datasheet/2/150/2506031217Z0-471794.pdf, Height="0.8 mm", Impedance="120 Ohms", Length="1.6 mm", Manufacturer Part Number=2506031217Z0, Minimum Order Quantity=1, Packaging="Cut Tape", Pricing 1="1=0.032, 2500=0.027, 4000=0.025, 8000=0.024, 24000=0.022, 48000=0.021, 100000=0.018, 400000=0.016 (EUR)", Product="Ferrite Chip Beads", Product Type="Ferrite Beads", Reeling=True, RoHS="RoHS Compliant", RoHS - Mouser=Y, Standard Pack Qty=4000, Stock 1=9619, Subcategory=Ferrites, Supplier 1=Mouser, Termination=-, Termination Style=SMD/SMT, Type="Multilayer Ferrite Chip Bead", Width="0.8 mm"
P2 P3: library part 1881545
P4 SWD: library part "Header 2", "Header, 2-Pin", LatestRevisionDate=17-Jul-2002, LatestRevisionNote="Re-released for DXP Platform.", Publisher="Altium Limited"
Q1 Q2 Q3: "MOSFET 20V N-Channel PowerTrench", Id - Continuous Drain Current="900 mA", Manufacturer="ON Semiconductor / Fairchild", Maximum Operating Temperature="+ 150 C", Minimum Operating Temperature="- 55 C", Package / Case=SOT-23-3, Pd - Power Dissipation="350 mW", Rds On - Drain-Source Resistance="164 mOhms", Supplier Part Number 1=512-FDV305N, Vds - Drain-Source Breakdown Voltage="20 V", Vgs - Gate-Source Voltage="12 V", Brand="ON Semiconductor / Fairchild", Category=MOSFET, Channel Mode=Enhancement, ComponentLink1Description=https://www.mouser.com/datasheet/2/308/FDV305N-1300591.pdf, ComponentLink1URL=https://www.mouser.com/datasheet/2/308/FDV305N-1300591.pdf, Configuration=Single, Fall Time="7 ns", Forward Transconductance - Min="3 S", Height="1.2 mm", Length="2.9 mm", Manufacturer Part Number=FDV305N, Minimum Order Quantity=1, Mounting Style=SMD/SMT, Number of Channels="1 Channel", Packaging="Cut Tape", Pricing 1="1=0.410, 10=0.293, 100=0.134, 1000=0.103, 3000=0.088, 9000=0.080, 24000=0.075, 45000=0.068 (EUR)", Product="MOSFET Small Signal", Product Type=MOSFET, Reeling=True, Rise Time="7 ns", RoHS="RoHS Compliant", RoHS - Mouser=Y, Series=FDV305N, Standard Pack Qty=3000, Stock 1=26056, Subcategory=MOSFETs, Supplier 1=Mouser, Technology=Si, Tradename=PowerTrench, Transistor Polarity=N-Channel, Transistor Type="1 N-Channel", Type=MOSFET, Typical Turn-Off Delay Time="8 ns", Typical Turn-On Delay Time="4.5 ns", Width="1.3 mm"
R1 R2 R7 R8 R12 R14 R18 R20 R24 R25 R28 R29 R36 R37: library part CRCW06031K00FKEAC, "Thick Film Resistors - SMD 1/10Watt 1Kohms 1% Commercial Use", Case Code - in=0603, Case Code - mm=1608, Manufacturer=Vishay, Maximum Operating Temperature="+ 155 C", Minimum Operating Temperature="- 55 C", Package / Case="0603 (1608 metric)", Power Rating="100 mW (1/10 W)", Resistance="1 kOhms", Supplier Part Number 1=71-CRCW06031K00FKEAC, Temperature Coefficient="100 PPM / C", Tolerance="1 %", Voltage Rating="75 V", Brand=Vishay, Category="Thick Film Resistors - SMD", ComponentLink1Description=https://www.mouser.com/datasheet/2/427/crcwce3-1223726.pdf, ComponentLink1URL=https://www.mouser.com/datasheet/2/427/crcwce3-1223726.pdf, Features=-, Height="0.45 mm", Length="1.55 mm", Manufacturer Part Number=CRCW06031K00FKEAC, Minimum Order Quantity=1, Mounting Style="PCB Mount", Packaging="Cut Tape", Pricing 1="1=0.087, 10=0.024, 100=0.010, 500=0.006, 1000=0.003, 5000=0.003 (EUR)", Product="Thick Film Resistors SMD", Product Status="New Product", Product Type="Thick Film Resistors", Reeling=True, RoHS="RoHS Compliant By Exemption", RoHS - Mouser=E, Series="CRCW-C e3", Standard Pack Qty=5000, Stock 1=673640, Subcategory=Resistors, Supplier 1=Mouser, Technology="Thick Film", Termination Style=SMD/SMT, Width="0.85 mm"
R3 R9 R15 R21 R27 R30: library part SFR03EZPF1002, "Thick Film Resistors - SMD 0603 10Kohms 1% Anti-Sulfur AEC-Q200", Case Code - in=0603, Case Code - mm=1608, Manufacturer="ROHM Semiconductor", Maximum Operating Temperature="+ 155 C", Minimum Operating Temperature="- 55 C", Package / Case="0603 (1608 metric)", Power Rating="100 mW (1/10 W)", Resistance="10 kOhms", Supplier Part Number 1=755-SFR03EZPF1002, Temperature Coefficient="100 PPM / C", Tolerance="1 %", Voltage Rating="50 V", Application="Automotive Grade", Brand="ROHM Semiconductor", Category="Thick Film Resistors - SMD", ComponentLink1Description=https://www.mouser.com/datasheet/2/348/sfr-e-1507454.pdf, ComponentLink1URL=https://www.mouser.com/datasheet/2/348/sfr-e-1507454.pdf, Features="Anti-Sulfur Resistors", Height="0.45 mm", Length="1.6 mm", Manufacturer Part Number=SFR03EZPF1002, Minimum Order Quantity=1, Mounting Style="PCB Mount", Packaging="Cut Tape", Pricing 1="1=0.087, 10=0.069, 100=0.024, 1000=0.017, 5000=0.013, 10000=0.011, 25000=0.010, 50000=0.009, 100000=0.008 (EUR)", Product="Thick Film Resistors SMD", Product Status="New Product", Product Type="Thick Film Resistors", Reeling=True, RoHS="RoHS Compliant", RoHS - Mouser=Y, Series=SFR, Standard Pack Qty=5000, Stock 1=16683, Subcategory=Resistors, Supplier 1=Mouser, Technology="Thick Film", Termination Style=SMD/SMT, Width="0.8 mm"
R4: library part AC0603FR-13470RL, "Thick Film Resistors - SMD 470 ohm 1% 1/10W AEC-Q200", Case Code - in=0603, Case Code - mm=1608, Manufacturer=Yageo, Maximum Operating Temperature="+ 155 C", Minimum Operating Temperature="- 55 C", Package / Case="0603 (1608 metric)", Power Rating="100 mW (1/10 W)", Supplier Part Number 1=603-AC0603FR-13470RL, Temperature Coefficient="100 PPM / C", Tolerance="1 %", Brand=Yageo, Category="Thick Film Resistors - SMD", ComponentLink1Description=https://www.mouser.com/datasheet/2/447/PYu-AC_51_RoHS_L_6-1152827.pdf, ComponentLink1URL=https://www.mouser.com/datasheet/2/447/PYu-AC_51_RoHS_L_6-1152827.pdf, Features=-, Height="0.45 mm", Length="1.6 mm", Manufacturer Part Number=AC0603FR-13470RL, Minimum Order Quantity=1, Mounting Style="PCB Mount", Packaging="Cut Tape", Pricing 1="1=0.087, 10=0.019, 100=0.007, 1000=0.005, 2500=0.003, 20000=0.003 (EUR)", Product="Thick Film Resistors General Purpose", Product Status="New Product", Product Type="Thick Film Resistors", Reeling=True, Resistance="470 Ohms", RoHS="RoHS Compliant", RoHS - Mouser=Y, Series=AC, Standard Pack Qty=20000, Stock 1=35113, Subcategory=Resistors, Supplier 1=Mouser, Technology="Thick Film", Termination Style=SMD/SMT, Width="0.8 mm"
R5 R6: library part RC0603FR-0710KL, "Thick Film Resistors - SMD 10K OHM 1%", Case Code - in=0603, Case Code - mm=1608, Manufacturer=Yageo, Maximum Operating Temperature="+ 155 C", Minimum Operating Temperature="- 55 C", Package / Case="0603 (1608 metric)", Power Rating="100 mW, 200 mW", Resistance="10 kOhms", Supplier Part Number 1=603-RC0603FR-0710KL, Temperature Coefficient="100 PPM / C", Tolerance="1 %", Voltage Rating="75 V", Application="High Reliability", Brand=Yageo, Category="Thick Film Resistors - SMD", ComponentLink1Description=https://www.mouser.com/datasheet/2/447/PYu-RC_Group_51_RoHS_L_9-1314892.pdf, ComponentLink1URL=https://www.mouser.com/datasheet/2/447/PYu-RC_Group_51_RoHS_L_9-1314892.pdf, Features=-, Height="0.45 mm", Length="1.6 mm", Manufacturer Part Number=RC0603FR-0710KL, Minimum Order Quantity=1, Mounting Style="PCB Mount", Packaging="Cut Tape", Pricing 1="1=0.087, 10=0.016, 100=0.005, 1000=0.004, 5000=0.003, 50000=0.002 (EUR)", Product="Thick Film Resistors SMD", Product Type="Thick Film Resistors", Reeling=True, RoHS="RoHS Compliant", RoHS - Mouser=Y, Series=RC, Standard Pack Qty=5000, Stock 1=22043469, Subcategory=Resistors, Supplier 1=Mouser, Technology="Thick Film", Termination Style=SMD/SMT, Type="General Purpose", Width="0.8 mm"
R10 R16 R22: library part RC0603FR-077K5L, "Thick Film Resistors - SMD 7.5K OHM 1%", Case Code - in=0603, Case Code - mm=1608, Manufacturer=Yageo, Maximum Operating Temperature="+ 155 C", Minimum Operating Temperature="- 55 C", Package / Case="0603 (1608 metric)", Power Rating="100 mW, 200 mW", Resistance="7.5 kOhms", Supplier Part Number 1=603-RC0603FR-077K5L, Temperature Coefficient="100 PPM / C", Tolerance="1 %", Voltage Rating="75 V", Application="High Reliability", Brand=Yageo, Category="Thick Film Resistors - SMD", ComponentLink1Description=https://www.mouser.com/datasheet/2/447/PYu-RC_Group_51_RoHS_L_9-1314892.pdf, ComponentLink1URL=https://www.mouser.com/datasheet/2/447/PYu-RC_Group_51_RoHS_L_9-1314892.pdf, Features=-, Height="0.45 mm", Length="1.6 mm", Manufacturer Part Number=RC0603FR-077K5L, Minimum Order Quantity=1, Mounting Style="PCB Mount", Packaging="Cut Tape", Pricing 1="1=0.087, 10=0.016, 100=0.005, 1000=0.004, 5000=0.003, 50000=0.002 (EUR)", Product="Thick Film Resistors SMD", Product Type="Thick Film Resistors", Reeling=True, RoHS="RoHS Compliant By Exemption", RoHS - Mouser=E, Series=RC, Standard Pack Qty=5000, Stock 1=148379, Subcategory=Resistors, Supplier 1=Mouser, Technology="Thick Film", Termination Style=SMD/SMT, Type="General Purpose", Width="0.8 mm"
R11 R17 R23: library part RC0603FR-07523RL, "Thick Film Resistors - SMD 523 OHM 1%", Case Code - in=0603, Case Code - mm=1608, Manufacturer=Yageo, Maximum Operating Temperature="+ 155 C", Minimum Operating Temperature="- 55 C", Package / Case="0603 (1608 metric)", Power Rating="100 mW, 200 mW", Resistance="523 Ohms", Supplier Part Number 1=603-RC0603FR-07523RL, Temperature Coefficient="100 PPM / C", Tolerance="1 %", Voltage Rating="75 V", Application="High Reliability", Brand=Yageo, Category="Thick Film Resistors - SMD", ComponentLink1Description=https://www.mouser.com/datasheet/2/447/PYu-RC_Group_51_RoHS_L_9-1314892.pdf, ComponentLink1URL=https://www.mouser.com/datasheet/2/447/PYu-RC_Group_51_RoHS_L_9-1314892.pdf, Features=-, Height="0.45 mm", Length="1.6 mm", Manufacturer Part Number=RC0603FR-07523RL, Minimum Order Quantity=1, Mounting Style="PCB Mount", Packaging="Cut Tape", Pricing 1="1=0.087, 10=0.016, 100=0.005, 1000=0.004, 5000=0.003, 50000=0.002 (EUR)", Product="Thick Film Resistors SMD", Product Type="Thick Film Resistors", Reeling=True, RoHS="RoHS Compliant", RoHS - Mouser=Y, Series=RC, Standard Pack Qty=5000, Stock 1=47821, Subcategory=Resistors, Supplier 1=Mouser, Technology="Thick Film", Termination Style=SMD/SMT, Type="General Purpose", Width="0.8 mm"
R13 R19 R26: library part RC0603FR-072K49L, "Thick Film Resistors - SMD 2.49K OHM 1%", Case Code - in=0603, Case Code - mm=1608, Manufacturer=Yageo, Maximum Operating Temperature="+ 155 C", Minimum Operating Temperature="- 55 C", Package / Case="0603 (1608 metric)", Power Rating="100 mW, 200 mW", Resistance="2.49 kOhms", Supplier Part Number 1=603-RC0603FR-072K49L, Temperature Coefficient="100 PPM / C", Tolerance="1 %", Voltage Rating="75 V", Application="High Reliability", Brand=Yageo, Category="Thick Film Resistors - SMD", ComponentLink1Description=https://www.mouser.com/datasheet/2/447/PYu-RC_Group_51_RoHS_L_9-1314892.pdf, ComponentLink1URL=https://www.mouser.com/datasheet/2/447/PYu-RC_Group_51_RoHS_L_9-1314892.pdf, Features=-, Height="0.45 mm", Length="1.6 mm", Manufacturer Part Number=RC0603FR-072K49L, Minimum Order Quantity=1, Mounting Style="PCB Mount", Packaging="Cut Tape", Pricing 1="1=0.087, 10=0.016, 100=0.005, 1000=0.004, 5000=0.003, 50000=0.002 (EUR)", Product="Thick Film Resistors SMD", Product Type="Thick Film Resistors", Reeling=True, RoHS="RoHS Compliant By Exemption", RoHS - Mouser=E, Series=RC, Standard Pack Qty=5000, Stock 1=331833, Subcategory=Resistors, Supplier 1=Mouser, Technology="Thick Film", Termination Style=SMD/SMT, Type="General Purpose", Width="0.8 mm"
R31 R34 R35: library part CRCW06030000Z0EAC, "Thick Film Resistors - SMD 1/10Watt 0ohms Commercial Use", Case Code - in=0603, Case Code - mm=1608, Manufacturer=Vishay, Maximum Operating Temperature="+ 155 C", Minimum Operating Temperature="- 55 C", Package / Case="0603 (1608 metric)", Power Rating="100 mW (1/10 W)", Resistance="0 Ohms", Supplier Part Number 1=71-CRCW06030000Z0EAC, Temperature Coefficient=-, Voltage Rating="75 V", Brand=Vishay, Category="Thick Film Resistors - SMD", ComponentLink1Description=https://www.mouser.com/datasheet/2/427/crcwce3-1223726.pdf, ComponentLink1URL=https://www.mouser.com/datasheet/2/427/crcwce3-1223726.pdf, Features=-, Height="0.45 mm", Length="1.55 mm", Manufacturer Part Number=CRCW06030000Z0EAC, Minimum Order Quantity=1, Mounting Style="PCB Mount", Packaging="Cut Tape", Pricing 1="1=0.087, 10=0.024, 100=0.010, 1000=0.004, 2000=0.003, 5000=0.003 (EUR)", Product="Thick Film Resistors SMD", Product Status="New Product", Product Type="Thick Film Resistors", Reeling=True, RoHS="RoHS Compliant By Exemption", RoHS - Mouser=E, Series="CRCW-C e3", Standard Pack Qty=5000, Stock 1=995828, Subcategory=Resistors, Supplier 1=Mouser, Technology="Thick Film", Termination Style=SMD/SMT, Width="0.85 mm"
R32 R33: library part RC0603FR-071ML, "Thick Film Resistors - SMD 1M OHM 1%", Case Code - in=0603, Case Code - mm=1608, Manufacturer=Yageo, Maximum Operating Temperature="+ 155 C", Minimum Operating Temperature="- 55 C", Package / Case="0603 (1608 metric)", Power Rating="100 mW, 200 mW", Resistance="1 MOhms", Supplier Part Number 1=603-RC0603FR-071ML, Temperature Coefficient="100 PPM / C", Tolerance="1 %", Voltage Rating="75 V", Application="High Reliability", Brand=Yageo, Category="Thick Film Resistors - SMD", ComponentLink1Description=https://www.mouser.com/datasheet/2/447/PYu-RC_Group_51_RoHS_L_9-1314892.pdf, ComponentLink1URL=https://www.mouser.com/datasheet/2/447/PYu-RC_Group_51_RoHS_L_9-1314892.pdf, Features=-, Height="0.45 mm", Length="1.6 mm", Manufacturer Part Number=RC0603FR-071ML, Minimum Order Quantity=1, Mounting Style="PCB Mount", Packaging="Cut Tape", Pricing 1="1=0.087, 10=0.016, 100=0.005, 1000=0.004, 5000=0.003, 50000=0.002 (EUR)", Product="Thick Film Resistors SMD", Product Type="Thick Film Resistors", Reeling=True, RoHS="RoHS Compliant", RoHS - Mouser=Y, Series=RC, Standard Pack Qty=5000, Stock 1=5552342, Subcategory=Resistors, Supplier 1=Mouser, Technology="Thick Film", Termination Style=SMD/SMT, Type="General Purpose", Width="0.8 mm"
U1: library part node_v1
U2 U4 U6: "ESD Suppressors / TVS Diodes IP4220CZ6/SC-74/REEL 13\" Q1/T1", Manufacturer=Nexperia, Supplier Part Number 1=771-IP4220CZ6F, Brand=Nexperia, Category="ESD Suppressors / TVS Diodes", Manufacturer Part Number=IP4220CZ6F, Minimum Order Quantity=1, Packaging="Cut Tape", Pricing 1="1=0.349, 10=0.272, 100=0.147, 1000=0.110, 2500=0.095, 10000=0.089, 20000=0.082, 50000=0.079 (EUR)", Product Type="TVS Diodes", Reeling=True, RoHS="RoHS Compliant", RoHS - Mouser=Y, Standard Pack Qty=10000, Stock 1=23187, Subcategory="TVS Diodes / ESD Suppression Diodes", Supplier 1=Mouser
U3: library part MCP9808T-E/MS, "Board Mount Temperature Sensors Silicon temp sensor with I2C interface", Manufacturer="Microchip Technology", Maximum Operating Temperature="+ 125 C", Minimum Operating Temperature="- 40 C", Operating Supply Current="200 uA", Package / Case=MSOP-8, Supplier Part Number 1=579-MCP9808T-E/MS, Supply Voltage - Max="5.5 V", Supply Voltage - Min="2.7 V", Accuracy="+/- 1 C", Brand="Microchip Technology", Category="Board Mount Temperature Sensors", ComponentLink1Description=https://www.mouser.com/datasheet/2/268/25095A-15487.pdf, ComponentLink1URL=https://www.mouser.com/datasheet/2/268/25095A-15487.pdf, Interface Type="2-Wire, I2C, SMBus", Manufacturer Part Number=MCP9808T-E/MS, Minimum Order Quantity=1, Mounting Style=SMD/SMT, Output Type=Digital, Packaging="Cut Tape", Pricing 1="1=1.01, 10=0.996, 25=0.845, 100=0.764, 2500=0.764 (EUR)", Product=Sensor, Product Type="Temperature Sensors", Reeling=True, Resolution="16 bit", RoHS="RoHS Compliant", RoHS - Mouser=Y, Series=MCP9808T, Shutdown=Shutdown, Standard Pack Qty=2500, Stock 1=2211, Subcategory=Sensors, Supplier 1=Mouser
U5: library part AD7194BCPZ, "Analog to Digital Converters - ADC 8CH Ultra Low Noise 24Bit w/ PGA", Input Voltage="+/- 2.5 V", Manufacturer="Analog Devices", Maximum Operating Temperature="+ 105 C", Minimum Operating Temperature="- 40 C", Operating Supply Voltage="3.3 V, 5 V", Package / Case=LFCSP-32, Pd - Power Dissipation="29 mW", Supplier Part Number 1=584-AD7194BCPZ, Architecture=Sigma-Delta, Brand="Analog Devices", Category="Analog to Digital Converters - ADC", ComponentLink1Description=https://www.mouser.com/datasheet/2/609/AD7194-1501808.pdf, ComponentLink1URL=https://www.mouser.com/datasheet/2/609/AD7194-1501808.pdf, Development Kit=EVAL-AD7194EBZ, Gain Error="+/- 0.005 %FSR", Height="0.73 mm", INL - Integral Nonlinearity="+/- 30 ppm of FSR", Input Type=Differential/Pseudo-Differential, Interface Type="Serial, 3-Wire, SPI", Length="5 mm", Manufacturer Part Number=AD7194BCPZ, Minimum Order Quantity=1, Mounting Style=SMD/SMT, Number of ADC Inputs="16 Input/8 Input", Number of Channels="8 Channel", Number of Converters="1 Converter", Packaging=Tray, Pricing 1="1=13.48, 10=12.23, 25=11.49, 50=11.06, 100=9.96, 250=9.20, 500=8.65, 1000=8.35 (EUR)", Product="Analog to Digital Converters", Product Type="ADCs - Analog to Digital Converters", Reeling=False, Reference Type=External, Resolution="24 bit", RoHS="RoHS Compliant", RoHS - Mouser=Y, Sample and Hold=No, Sampling Rate="4.8 kS/s", Series=AD7194, Standard Pack Qty=490, Stock 1=878, Subcategory="Data Converter ICs", Supplier 1=Mouser, Width="5 mm"
U7: "Operational Amplifiers - Op Amps Single 1.8V 1MHz", en - Input Voltage Noise Density="28 nV/sqrt Hz", Ib - Input Bias Current="1 pA", In - Input Noise Current Density="0.0006 pA/sqrt Hz", Manufacturer="Microchip Technology", Maximum Operating Temperature="+ 85 C", Minimum Operating Temperature="- 40 C", Operating Supply Current="100 uA", Operating Supply Voltage="1.8 V to 5.5 V", Output Current per Channel="23 mA", Package / Case=SOT-23-5, PSRR - Power Supply Rejection Ratio="86 dB", Supplier Part Number 1=579-MCP6001T-I/OT, Supply Voltage - Max="5.5 V", Supply Voltage - Min="1.8 V", Voltage Gain dB="112 dB", Vos - Input Offset Voltage="4.5 mV", Amplifier Type="Low Power Amplifier", Brand="Microchip Technology", Category="Operational Amplifiers - Op Amps", CMRR - Common Mode Rejection Ratio="60 dB", ComponentLink1Description=https://www.mouser.com/datasheet/2/268/21733e-41017.pdf, ComponentLink1URL=https://www.mouser.com/datasheet/2/268/21733e-41017.pdf, GBP - Gain Bandwidth Product="1 MHz", Height="1.3 mm (Max)", Length="3.1 mm (Max)", Manufacturer Part Number=MCP6001T-I/OT, Minimum Order Quantity=1, Mounting Style=SMD/SMT, Number of Channels="1 Channel", Packaging="Cut Tape", Pricing 1="1=0.210, 25=0.180, 100=0.162, 3000=0.162 (EUR)", Product="Operational Amplifiers", Product Type="Op Amps - Operational Amplifiers", Reeling=True, RoHS="RoHS Compliant", RoHS - Mouser=Y, Shutdown="No Shutdown", SR - Slew Rate="0.6 V/us", Standard Pack Qty=3000, Stock 1=73026, Subcategory="Amplifier ICs", Supplier 1=Mouser, Supply Type=Single, Technology=CMOS, Width="1.8 mm (Max)"
VR1: library part TLV75533PDBVR, "LDO Voltage Regulators 500-mA, Low IQ, Small Size, Low Dropout Regulator 5-SOT-23 -40 to 125", Dropout Voltage="220 mV", Dropout Voltage - Max="215 mV", Input Voltage MAX="5.5 V", Input Voltage MIN="1.45 V", Manufacturer="Texas Instruments", Maximum Operating Temperature="+ 125 C", Minimum Operating Temperature="- 40 C", Operating Temperature Range="- 40 C to + 125 C", Output Current="500 mA", Output Voltage="3.3 V", Output Voltage Range=-, Package / Case=SOT-23-5, Quiescent Current="25 uA", Supplier Part Number 1=595-TLV75533PDBVR, Voltage Regulation Accuracy="1.5 %", Brand="Texas Instruments", Category="LDO Voltage Regulators", CNHTS=8542319000, HTS Code=8542390001, Line Regulation="2 mV", Load Regulation="0.06 V/A", Manufacturer Part Number=TLV75533PDBVR, Minimum Order Quantity=1, Mounting Style=SMD/SMT, Number of Outputs="1 Output", Output Type=Fixed, Packaging="Cut Tape", Polarity=Positive, Pricing 1="1=0.541, 10=0.454, 100=0.292, 1000=0.234, 2000=0.212, 3000=0.197, 9000=0.190 (EUR)", Product="LDO Voltage Regulators", Product Status="New Product", Product Type="LDO Voltage Regulators", PSRR / Ripple Rejection - Typ="46 dB", Reeling=True, RoHS="RoHS Compliant", RoHS - Mouser=Y, Series=TLV755P, Standard Pack Qty=3000, Stock 1=48621, Subcategory="PMIC - Power Management ICs", Supplier 1=Mouser, Type="Low Quiescent Current, Ultra Small"
VR2: library part AD1582BRTZ-REEL7, "Voltage References 2.5V MICROPOWER REF IC", Input Voltage="2.7 V to 12 V", Manufacturer="Analog Devices", Maximum Operating Temperature="+ 125 C", Minimum Operating Temperature="- 40 C", Operating Supply Current="70 uA", Output Current="5 mA", Output Voltage="2.5 V", Package / Case=SOT-23-3, Supplier Part Number 1=584-AD1582BRTZ-R7, Temperature Coefficient="50 PPM/C", Accuracy="3.5 mV/mA", Brand="Analog Devices", Category="Voltage References", ComponentLink1Description=https://www.mouser.com/datasheet/2/609/AD1582_1583_1584_1585-876960.pdf, ComponentLink1URL=https://www.mouser.com/datasheet/2/609/AD1582_1583_1584_1585-876960.pdf, Description/Function="2.5 V micropower, precision series mode voltage reference", Height="1.02 mm (Max)", Length="2.9 mm", Load Regulation="3.5 mV/mA", Manufacturer Part Number=AD1582BRTZ-REEL7, Minimum Order Quantity=1, Mounting Style=SMD/SMT, Packaging="Cut Tape", Pricing 1="1=1.97, 10=1.79, 25=1.60, 100=1.46, 250=1.31, 500=1.14, 1000=0.952, 3000=0.919 (EUR)", Product="Voltage References", Product Type="Voltage References", Reeling=True, Reference Type="Series Precision References", RoHS="RoHS Compliant", RoHS - Mouser=Y, Series=AD1582, Shunt Current - Max="5 mA", Standard Pack Qty=3000, Stock 1=7339, Subcategory="PMIC - Power Management ICs", Supplier 1=Mouser, Topology="Series References", Width="1.3 mm"

## Free pads (board coordinates)
  round 98.43 hole 78.74: 4(-1889.76,78.74) 4(-1889.76,1889.76) 5(-98.43,984.25) 5(-78.74,78.74) 6(-78.74,1889.76)

## Via types
v1: diameter 24, hole 12, Top Layer to Bottom Layer, tented both sides, 332 vias
v2: diameter 24, hole 12, Top Layer to Bottom Layer, tented bottom, 37 vias

## Nets (pads, with @x,y where several pads share a name; then routed paths per layer and width w, separated by ;. In a path a pad name is that pad's centre, name@x,y a point inside that pad or via, vN(x,y) a via of type N, cw(c..) or ccw(c..) an arc to the next point about the centre after c; other vN are vias at no path point)
3v3A: C13.2 C14.1 C31.1 L1.2 U5.23 | length 511.4
  Top Layer w6: -1259.43,796.67 -1258.85,797.24 U5.23
  Top Layer w20: L1.2 C31.1 -1525.59,767.66 -1496.58,796.67 C14.1 C13.2 -1259.43,796.67
3v3E: C11.2 C12.1 C23.2 C29.1 C30.1 C33.2 C34.2 L1.1 P2.3 P2.6 P2.9 P2.12 R4.1 R5.2 R6.2 U2.5 U3.8 U4.5 U5.24 U6.5 U7.5 VR1.5 VR2.3 | length 7839.1
  Top Layer w6: -1220.47,751.78 U5.24
  Top Layer w15: U3.8 -1487.73,1790.35 -1417.32,1860.77
  Top Layer w20: -1918.05,1646.65 -1950.63,1613.03 ; R4.1 -1918.31,1580.71 -1950.63,1613.03 ; VR1.5 C29.1 -1939.96,495.08 -1950.63,505.75 -1950.63,803.15 ; R6.2 R5.2 -1766.9,1831.53 -1737.55,1860.87 -1417.42,1860.87 ; VR2.3 C34.2 C33.2 -1799.41,829.75 -1826.01,803.15 ; L1.1 C30.1 ; U7.5 C23.2 ; -1417.32,1860.77 -1417.42,1860.87 ; -1330.69,1860.69 -1330.88,1860.87 -1417.42,1860.87 ; C12.1@-1221.01,668.24 C11.2 -1340.01,668.24 -1418.01,590.24 -1418.01,392.53 -1468.15,342.39 ; C12.1 -1220.47,751.78 ; P2.3@-1123.62,354.33 -1205.66,272.29 C23.2 ; U6.5 -1000.98,1732.28 -958.66,1774.61 -958.66,1855.41 -963.58,1860.33 ; U4.5 -636.81,1732.28 -597.44,1771.65 -597.44,1855.31 -602.1,1859.98 -617.13,1860.24 ; U2.5 -259.84,1732.28 -228.71,1763.41 -228.71,1859.98 ; -1950.63,803.15 -1826.01,803.15 ; -1950.63,803.15 -1950.63,1613.03 ; -1826.01,803.15 -1670.28,803.15 -1586.61,719.49 -1586.61,476.85 -1562.52,452.76 C30.1 ; C30.1 -1525.59,399.83 -1468.15,342.39 ; C23.2 -1468.15,342.39
  Top Layer w30: -1918.05,1646.65 -1451.77,1646.65 -1409.45,1688.98 -1409.45,1781.93 -1330.69,1860.69 -963.58,1860.33 -602.1,1859.98 -228.71,1859.98
  Bottom Layer w20: P2.3 -1070.87,293.7 -848.03,293.7 -831.5,310.23 -818.22,296.96 -548.93,296.96 -531.5,314.39 -523.05,314.39 -505.62,296.96 -250.28,296.96 -231.5,315.75 P2.12
AGND: C2.2 C3.1 C5.2 C6.1 C7.2 C9.2 C10.1 C11.1 C12.2 C13.1 C14.2 C15.2 C17.2 C18.1 C19.2 C21.2 C22.1 C23.1 C25.2 C26.1 C27.2 C28.2 C29.2 C30.2 C31.2 C32.1 C33.1 C34.1 C36.1 D1.2 D2.1 D3.1 D4.1 P2.1 P2.4 P2.7 P2.10 P4.1 pad.4 pad.5 pad.6 Q1.2 Q2.2 Q3.2 R13.1 R19.1 R26.1 R33.1 R37.2 U1.1 U1.10 U1.14 U1.16 U1.19 U2.2 U3.4 U3.5 U3.6 U3.7 U4.2 U5.5 U5.6 U5.18 U5.21 U5.22 U5.33 U6.2 U7.2 VR1.2 VR2.2 | length 665.7
  Top Layer w6: v2(-1338.58,917.32) -1322.32,901.06 -1316.93,895.67 U5.18 ; U5.22 -1249.1,816.93 -1249.55,816.48 -1263.77,830.71 v2(-1267.72,830.71) -1261.81,836.61 U5.21 ; U5.5 -962.6,856.3 v2(-948.82,870.08) -954.72,875.98 U5.6 ; v2(-834.65,771.65) -834.65,759.84 -828.91,754.1 C7.2
  Top Layer w10: v1(-1141.73,1186.02) -1141.73,1198.82 -1129.99,1210.56 C22.1 ; v1(-1067.91,1226.38) -1067.91,1242.13 -1064.22,1245.82 C17.2
  Bottom Layer w10: v2(-1169.29,846.46) v2(-1125.98,846.46) v2(-1082.68,846.46)